# EAGLE board EJ2 Clase 1 - Robótica (EAGLE 9.7.0)

Size 58.56 x 36.05 mm. Coordinates in mm from the lower left corner, seen from the top.
Outline: 0,0 58.56,0 58.56,36.05 0,36.05 0,0
Copper layers (1*16): Top 0.035mm / dielectric 1.5mm / Bottom 0.035mm
Design rules "default": minimum track width 6mil, minimum drill 0.35mm, track to track 6mil, track to pad 6mil, pad to pad 6mil, via to via 6mil, smd to smd 6mil, copper to edge 40mil, drill to drill 6mil, minimum pad ring 10mil, minimum via ring 8mil, stop-mask expansion 4mil, vias tented up to drill 0mil, thermal gap 10mil

## Footprints (pad centres in the part's own frame; a part is rotated, then mirrored left to right if it is on the bottom)
BATTERY-GENERIC = drill 1.118 pad 3.15 octagon: + 2.54,0; - -2.54,0
1X02 = drill 1.016 long: 1 -1.27,0; 2 1.27,0
SWITCH-SPDT-PTH-8.5X3.7MM = drill 1.016 pad 1.88: 1 -2.54,0; 2 0,0; 3 2.54,0

## Placement (x,y rotation side)
BAT1  9V  [BATTERY-GENERIC]  30.63,8.26 180 top
L1  LIGHTBULB  [1X02]  5.79,29.23 0 top
L2  LIGHTBULB  [1X02]  52.84,29.78 0 top
S1  TOGGLE  [SWITCH-SPDT-PTH-8.5X3.7MM]  30.76,19.43 0 top

## Library data of the parts
BAT1 L1 L2 S1 = Tinkercad

## Nets
BAT1+: BAT1.+ L1.1 L2.2
BAT1-: BAT1.- S1.2
S1_O: L1.2 S1.1
S1_S: L2.1 S1.3

## Tracks (layer width: path | path; a pad name or v marks a point on that pad's centre or on a via)
BAT1+  (2 unrouted)
BAT1-  (1 unrouted)
S1_O  (1 unrouted)
S1_S  (1 unrouted)